# Altium PCB Copy of DAP-PCB.PcbDoc (part 3 of 5)
Units mm, origin at the board's own origin, x right, y up, seen from the top; angles counter-clockwise.
Board outline 63 x 53 mm, 6 copper layers (Top Layer (Sig), L2 (GND), L3 (Sig), L4 (Sig), L5 (GND), Bottom Layer (Sig)), stack 0.87 mm thick; 262 components, 167 nets, 874 pads, 298 vias.
Unrouted connection lines stored in the file: 134.
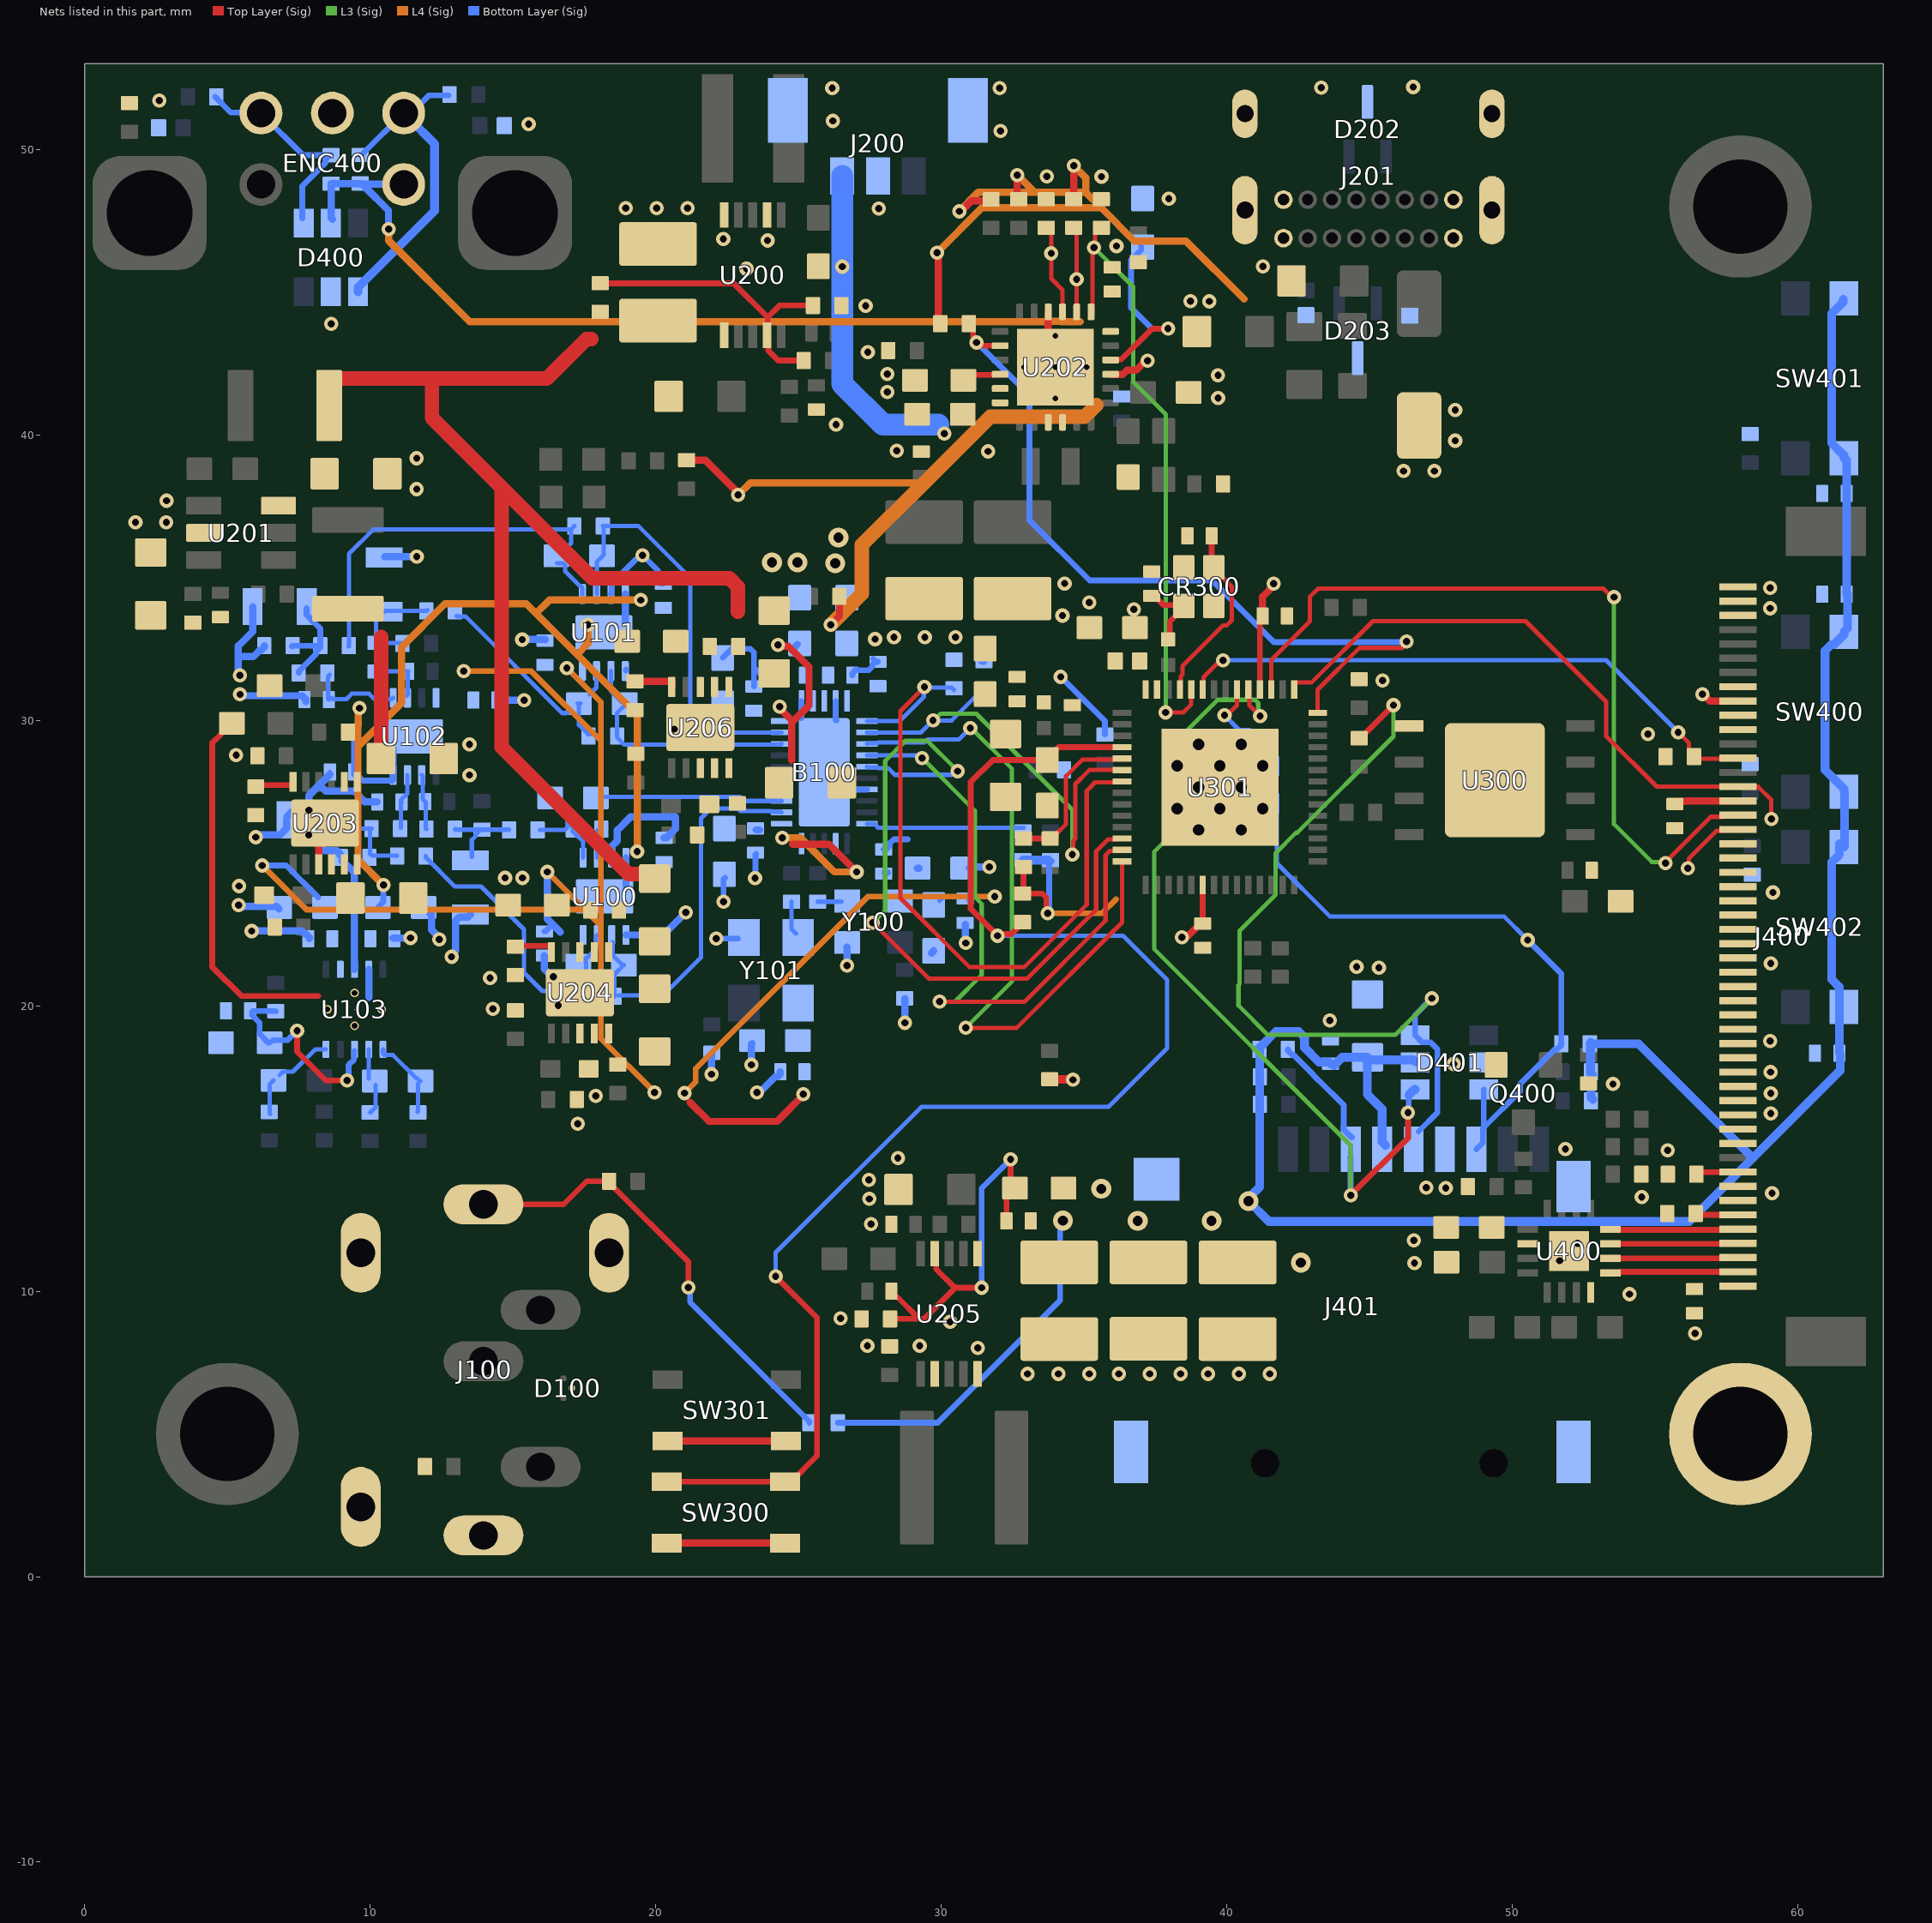
[diagram p6: the nets of this part, all layers, seen from the top]

## Part data (continued)
L204: library part #1-094, <Rating>=3.7A, <Tolerance>=0.2, <Value>=18uH, Manufacturer 1=Coilcraft, Manufacturer Part Number 1=XGL5050-183MEC, Supplier Part Number 1=2457-XGL5050-183MEC-ND, <Spec>=62.5mOhm, <Termination>=SMD, AL-PN=#1-094, Creator Project=DAP, Lead Time=N/A, PartType=Inductor, Status=Verified, SubType=Shielded, Supplier 1=Digikey, Supplier Label="18 µH Shielded Molded Inductor 4.5 A 62.5mOhm Max Nonstandard", Type=Standard
L300: library part #1-121, <Rating>=1A, <Value>=2nH, Manufacturer 1=TDK, Manufacturer Part Number 1=MHQ1005075HA2N0BTD25, Supplier Part Number 1=445-MHQ1005075HA2N0BTD25CT-ND, <Footprint>=0402, <Spec>=50mOhm, <Termination>=SMD, AL-PN=#1-121, Creator Project=DAP, Lead Time="12 Weeks", PartType=Inductor, Status=Verified, SubType=Shielded, Supplier 1=Digikey, Supplier Label="2 nH Shielded Multilayer Inductor 1 A 50mOhm Max 0402 (1005 Metric)", Type=Standard
L301: library part #1-120, <Rating>=250mA, <Tolerance>=0.03, <Value>=24nH, Manufacturer 1=TDK, Manufacturer Part Number 1=MHQ1005075HA24NHTD25, Supplier Part Number 1=445-MHQ1005075HA24NHTD25CT-ND, <Footprint>=0402, <Spec>=700mOhm, <Termination>=SMD, AL-PN=#1-120, Creator Project=DAP, Lead Time="12 Weeks", PartType=Inductor, Status=Verified, SubType=Shielded, Supplier 1=Digikey, Supplier Label="24 nH Shielded Multilayer Inductor 250 mA 700mOhm Max 0402 (1005 Metric)", Type=Standard
Q400: library part #1-130, <Rating>=2.5Vgs, <Value>=N-Type, Manufacturer 1=MCC, Manufacturer Part Number 1=2N7002-TP, Package="TO-236 MCC", Supplier Part Number 1=2N7002-TPMSCT-ND, <Termination>=SMD, AL-PN=#1-130, Check_prices=https://www.snapeda.com/parts/2N7002-TP/Micro+Commercial/view-part/?ref=eda, Creator Project=DAP, Lead Time=N/A, MF="Micro Commercial", MP=2N7002-TP, PartType=Transistor, SnapEDA_Link=https://www.snapeda.com/parts/2N7002-TP/Micro+Commercial/view-part/?ref=snap, Status=Verified, SubType=MOSFET, Supplier 1=Digikey, Supplier Label="N-Channel 60 V 115mA (Ta) 1.08W Surface Mount SOT-23", Type=Standard
R100 R101 R102 R103 R116 R117 R121 R123 R131 R134: library part #1-105, <Rating>=1/16W, <Tolerance>=0.001, <Value>=499Ohm, Manufacturer 1=YAGEO, Manufacturer Part Number 1=RT0402BRD07499RL, Supplier Part Number 1=YAG1440CT-ND, <Footprint>=0402, <Termination>=SMD, AL-PN=#1-105, Creator Project=DAP, Lead Time="23 Weeks", PartType=Resistor, Status=Verified, Supplier 1=Digikey, Supplier Label="499 Ohms ±0.1% 0.063W, 1/16W Chip Resistor 0402 (1005 Metric) Thin Film", Type=Standard
R104 R105 R303 R304 R305 R306 R307: library part #1-102, <Rating>=1/16W, <Tolerance>=0.01, <Value>=22Ohm, Manufacturer 1=YAGEO, Manufacturer Part Number 1=RC0402FR-0722RL, Supplier Part Number 1=311-22.0LRCT-ND, <Footprint>=0402, <Termination>=SMD, AL-PN=#1-102, Creator Project=DAP, Lead Time="22 Weeks", PartType=Resistor, Status=Verified, Supplier 1=Digikey, Supplier Label="22 Ohms ±1% 0.063W, 1/16W Chip Resistor 0402 (1005 Metric) Moisture Resistant Thick Film", Type=Standard
R106 R107 R109 R110 R111 R112 R113 R119 R129 R135 R208 R209 R210 R211 R216 R221 R223 R242 R300 R301 R400 R401 R402 R403 R404 R405 R406 R407 R408 R412 R413 R414 R415 R416 R417 R418 R419 R422: library part #1-134, <Tolerance>=0.01, <Value>=10kOhm, Manufacturer 1=YAGEO, Manufacturer Part Number 1=AC0402FR-0710KL, Supplier Part Number 1=YAG3436CT-ND, <Footprint>=0402, <Termination>=SMD, AL-PN=#1-134, Creator Project=DAP, Lead Time="22 Weeks", PartType=Resistor, Status=Verified, Supplier 1=Digikey, Supplier Label="10 kOhms ±1% 0.063W, 1/16W Chip Resistor 0402 (1005 Metric) Automotive AEC-Q200, Moisture Resistant Thick Film", Type=Standard
R114 R115 R126 R133: library part #1-109, <Rating>=1/16W, <Tolerance>=0.001, <Value>=220Ohm, Manufacturer 1=YAGEO, Manufacturer Part Number 1=RT0402BRD07220RL, Supplier Part Number 1=YAG4207CT-ND, <Footprint>=0402, <Termination>=SMD, AL-PN=#1-109, Creator Project=DAP, Lead Time="23 Weeks", PartType=Resistor, Status=Verified, Supplier 1=Digikey, Supplier Label="220 Ohms ±0.1% 0.063W, 1/16W Chip Resistor 0402 (1005 Metric) Thin Film", Type=Standard
R118 R204 R205 R212 R228 R239 R240 R241 R245 R420 R421 R424 R425: library part #1-131, <Tolerance>=0.01, <Value>=100kOhm, Manufacturer 1=YAGEO, Manufacturer Part Number 1=RT0402BRD07100KL, Supplier Part Number 1=YAG1343CT-ND, <Footprint>=0402, <Termination>=SMD, AL-PN=#1-131, Creator Project=DAP, Lead Time="23 Weeks", PartType=Resistor, Status=Verified, Supplier 1=Digikey, Supplier Label="100 kOhms ±0.1% 0.063W, 1/16W Chip Resistor 0402 (1005 Metric) Thin Film", Type=Standard
R120 R122 R124 R132: library part #1-110, <Rating>=1/16W, <Tolerance>=0.001, <Value>=681Ohm, Manufacturer 1=YAGEO, Manufacturer Part Number 1=RT0402BRD07681RL, Supplier Part Number 1=YAG1466CT-ND, <Footprint>=0402, <Termination>=SMD, AL-PN=#1-110, Creator Project=DAP, Lead Time="23 Weeks", PartType=Resistor, Status=Verified, Supplier 1=Digikey, Supplier Label="681 Ohms ±0.1% 0.063W, 1/16W Chip Resistor 0402 (1005 Metric) Thin Film", Type=Standard
R125 R127: library part #1-113, <Rating>=1/16W, <Tolerance>=0.001, <Value>=4.7Ohm, Manufacturer 1=YAGEO, Manufacturer Part Number 1=RT0402BRE074R7L, Supplier Part Number 1=13-RT0402BRE074R7LCT-ND, <Footprint>=0402, <Termination>=SMD, AL-PN=#1-113, Creator Project=DAP, Lead Time="23 Weeks", PartType=Resistor, Status=Verified, Supplier 1=Digikey, Supplier Label="4.7 Ohms ±0.1% 0.063W, 1/16W Chip Resistor 0402 (1005 Metric) Thin Film", Type=Standard
R128 R203 R237: library part #1-079, <Rating>=1/16W, <Tolerance>=0.001, <Value>=54.9kOhm, Manufacturer 1=YAGEO, Manufacturer Part Number 1=RT0402BRD0754K9L, Supplier Part Number 1=YAG1452CT-ND, <Footprint>=0402, <Termination>=SMD, AL-PN=#1-079, Creator Project=DAP, Lead Time="20 Weeks", PartType=Resistor, Status=Verified, Supplier 1=Digikey, Supplier Label="54.9 kOhms ±0.1% 0.063W, 1/16W Chip Resistor 0402 (1005 Metric) Thin Film", Type=Standard
R130 R207 R226 R231 R238 R247: library part #1-075, <Rating>=0.1W, <Tolerance>=0.001, <Value>=50kOhm, Manufacturer 1=YAGEO, Manufacturer Part Number 1=RT0603BRD0750KL, Supplier Part Number 1=13-RT0603BRD0750KLCT-ND, <Footprint>=0603, <Termination>=SMD, AL-PN=#1-075, Creator Project=DAP, Lead Time="20 Weeks", PartType=Resistor, Status=Verified, Supplier 1=Digikey, Supplier Label="50 kOhms ±0.1% 0.1W, 1/10W Chip Resistor 0603 (1608 Metric) Thin Film", Type=Standard
R200: library part #1-074, <Rating>=1/16W, <Tolerance>=0.001, <Value>=220kOhm, Manufacturer 1=YAGEO, Manufacturer Part Number 1=RC0402BR-07220KL, Supplier Part Number 1=13-RC0402BR-07220KLCT-ND, <Footprint>=0402, <Termination>=SMD, AL-PN=#1-074, Creator Project=DAP, Lead Time="17 Weeks", PartType=Resistor, Status=Verified, Supplier 1=Digikey, Supplier Label="220 kOhms ±0.1% 0.063W, 1/16W Chip Resistor 0402 (1005 Metric) Moisture Resistant Thick Film", Type=Standard
R201: library part #1-091, <Rating>=1/16W, <Tolerance>=0.001, <Value>=309kOhm, Manufacturer 1=YAGEO, Manufacturer Part Number 1=RE0402BRE07309KL, Supplier Part Number 1=13-RE0402BRE07309KLCT-ND, <Footprint>=0402, <Termination>=SMD, AL-PN=#1-091, Creator Project=DAP, Lead Time="20 Weeks", PartType=Resistor, Status=Verified, Supplier 1=Digikey, Supplier Label="309 kOhms ±0.1% 0.063W, 1/16W Chip Resistor 0402 (1005 Metric) Thick Film", Type=Standard
R202: library part #1-067, <Rating>=0.1W, <Tolerance>=0.005, <Value>=274kOhm, Manufacturer 1=YAGEO, Manufacturer Part Number 1=RT0603DRE07274KL, Supplier Part Number 1=13-RT0603DRE07274KLCT-ND, <Footprint>=0603, <Termination>=SMD, AL-PN=#1-067, Creator Project=DAP, Lead Time="20 Weeks", PartType=Resistor, Status=Verified, Supplier 1=Digikey, Supplier Label="RES SMD 274K OHM 0.5% 1/10W 0603", Type=Standard
R206 R229 R246 R302: library part #1-043, <Rating>=1/16W, <Tolerance>=0.001, <Value>=1kOhm, Manufacturer 1=YAGEO, Manufacturer Part Number 1=RT0402BRD071KL, Supplier Part Number 1=YAG1386TR-ND, <Footprint>=0402, <Termination>=SMD, AL-PN=#1-043, Creator Project=aRTy, Lead Time="20 Weeks", PartType=Resistor, Status=Verified, Supplier 1=Digikey, Supplier Label="1 kOhms ±0.1% 0.063W, 1/16W Chip Resistor 0402 (1005 Metric) Thin Film", Type=Standard
R213 R224: library part #1-078, <Rating>=1/16W, <Tolerance>=0.001, <Value>=15kOhm, Manufacturer 1=YAGEO, Manufacturer Part Number 1=RT0402BRD0715KL, Supplier Part Number 1=YAG2302CT-ND, <Footprint>=0402, <Termination>=SMD, AL-PN=#1-078, Creator Project=DAP, Lead Time="20 Weeks", PartType=Resistor, Status=Verified, Supplier 1=Digikey, Supplier Label="15 kOhms ±0.1% 0.063W, 1/16W Chip Resistor 0402 (1005 Metric) Thin Film", Type=Standard
R214: library part #1-060, <Rating>=1/16W, <Tolerance>=0.01, <Value>=5kOhm, Manufacturer 1=YAGEO, Manufacturer Part Number 1=RC0402FR-075KL, Supplier Part Number 1=13-RC0402FR-075KLCT-ND, <Footprint>=0402, <Termination>=SMD, AL-PN=#1-060, Creator Project=DAP, Lead Time="17 Weeks", PartType=Resistor, Status=Verified, Supplier 1=Digikey, Supplier Label="5 kOhms ±1% 0.063W, 1/16W Chip Resistor 0402 (1005 Metric) Moisture Resistant Thick Film", Type=Standard
R215: library part #1-061, <Rating>=1/16W, <Tolerance>=0.005, <Value>=9.88kOhm, Manufacturer 1=YAGEO, Manufacturer Part Number 1=RT0402DRD079K88L, Supplier Part Number 1=311-2214-1-ND, <Footprint>=0402, <Termination>=SMD, AL-PN=#1-061, Creator Project=DAP, Lead Time="20 Weeks", PartType=Resistor, Status=Verified, Supplier 1=Digikey, Supplier Label="9.88 kOhms ±0.5% 0.063W, 1/16W Chip Resistor 0402 (1005 Metric) Thin Film", Type=Standard
R217: library part #1-065, <Rating>=0.1W, <Tolerance>=0.01, <Value>=270Ohm, Manufacturer 1=YAGEO, Manufacturer Part Number 1=RC0603FR-07270RL, Supplier Part Number 1=311-270HRCT-ND, <Footprint>=0603, <Termination>=SMD, AL-PN=#1-065, Creator Project=DAP, Lead Time="17 Weeks", PartType=Resistor, Status=Verified, Supplier 1=Digikey, Supplier Label="270 Ohms ±1% 0.1W, 1/10W Chip Resistor 0603 (1608 Metric) Moisture Resistant Thick Film", Type=Standard
R218: library part #1-064, <Rating>=0.1W, <Tolerance>=0.001, <Value>=500Ohm, Manufacturer 1=YAGEO, Manufacturer Part Number 1=RT0603BRC07500RL, Supplier Part Number 1=13-RT0603BRC07500RLCT-ND, <Footprint>=0603, <Termination>=SMD, AL-PN=#1-064, Creator Project=DAP, Lead Time="20 Weeks", PartType=Resistor, Status=Verified, Supplier 1=Digikey, Supplier Label="500 Ohms ±0.1% 0.1W, 1/10W Chip Resistor 0603 (1608 Metric) Thin Film", Type=Standard
R219: library part #1-087, <Rating>=1/16W, <Tolerance>=0.01, <Value>=88.7kOhm, Manufacturer 1=YAGEO, Manufacturer Part Number 1=RC0402FR-0788K7L, Supplier Part Number 1=311-88.7KLRCT-ND, <Footprint>=0402, <Termination>=SMD, AL-PN=#1-087, Creator Project=DAP, Lead Time="17 Weeks", PartType=Resistor, Status=Verified, Supplier 1=Digikey, Supplier Label="88.7 kOhms ±1% 0.063W, 1/16W Chip Resistor 0402 (1005 Metric) Moisture Resistant Thick Film", Type=Standard
R220: library part #1-086, <Rating>=1/10W, <Tolerance>=0.001, <Value>=135kOhm, Manufacturer 1=YAGEO, Manufacturer Part Number 1=RT0603BRD07135KL, Supplier Part Number 1=13-RT0603BRD07135KLCT-ND, <Footprint>=0603, <Termination>=SMD, AL-PN=#1-086, Creator Project=DAP, Lead Time="20 Weeks", PartType=Resistor, Status=Verified, Supplier 1=Digikey, Supplier Label="135 kOhms ±0.1% 0.1W, 1/10W Chip Resistor 0603 (1608 Metric) Thin Film", Type=Standard
R222 R243: library part #1-083, <Rating>=1/16W, <Tolerance>=0.01, <Value>=909kOhm, Manufacturer 1=YAGEO, Manufacturer Part Number 1=RC0402FR-07909KL, Supplier Part Number 1=YAG2377CT-ND, <Footprint>=0402, <Termination>=SMD, AL-PN=#1-083, Creator Project=DAP, Lead Time="17 Weeks", PartType=Resistor, Status=Verified, Supplier 1=Digikey, Supplier Label="909 kOhms ±1% 0.063W, 1/16W Chip Resistor 0402 (1005 Metric) Moisture Resistant Thick Film", Type=Standard
R225 R244: library part #1-084, <Rating>=1/16W, <Tolerance>=0.001, <Value>=90.9kOhm, Manufacturer 1=YAGEO, Manufacturer Part Number 1=RT0402BRD0790K9L, Supplier Part Number 1=YAG1489CT-ND, <Footprint>=0402, <Termination>=SMD, AL-PN=#1-084, Creator Project=DAP, Lead Time="20 Weeks", PartType=Resistor, Status=Verified, Supplier 1=Digikey, Supplier Label="90.9 kOhms ±0.1% 0.063W, 1/16W Chip Resistor 0402 (1005 Metric) Thin Film", Type=Standard
R227: library part #1-097, <Rating>=1/4W, <Tolerance>=0.01, <Value>=0.5Ohms, Manufacturer 1=YAGEO, Manufacturer Part Number 1=PE0805FRF7W0R5L, Supplier Part Number 1=13-PE0805FRF7W0R5LCT-ND, <Footprint>=0805, <Termination>=SMD, AL-PN=#1-097, Creator Project=DAP, Lead Time="20 Weeks", PartType=Resistor, Status=Verified, Supplier 1=Digikey, Supplier Label="500 mOhms ±1% 0.25W, 1/4W Chip Resistor 0805 (2012 Metric) Automotive AEC-Q200, Current Sense Metal Film", Type=Standard
R230: library part #1-088, <Rating>=1/16W, <Tolerance>=0.01, <Value>=15.4kOhm, Manufacturer 1=YAGEO, Manufacturer Part Number 1=RT0402BRD0715K4L, Supplier Part Number 1=YAG4177CT-ND, <Footprint>=0402, <Termination>=SMD, AL-PN=#1-088, Creator Project=DAP, Lead Time="20 Weeks", PartType=Resistor, Status=Verified, Supplier 1=Digikey, Supplier Label="15.4 kOhms ±0.1% 0.063W, 1/16W Chip Resistor 0402 (1005 Metric) Thin Film", Type=Standard
R232 R233 R248: library part #1-085, <Rating>=1/16W, <Tolerance>=0.001, <Value>=33.2kOhm, Manufacturer 1=YAGEO, Manufacturer Part Number 1=RT0402BRD0733K2L, Supplier Part Number 1=YAG4244CT-ND, <Footprint>=0402, <Termination>=SMD, AL-PN=#1-085, Creator Project=DAP, Lead Time="20 Weeks", PartType=Resistor, Status=Verified, Supplier 1=Digikey, Supplier Label="33.2 kOhms ±0.1% 0.063W, 1/16W Chip Resistor 0402 (1005 Metric) Thin Film", Type=Standard
R234 R235: library part #1-024, <Rating>=1/16W, <Tolerance>=0.001, <Value>=5.1kOhm, Manufacturer 1=YAGEO, Manufacturer Part Number 1=RT0402BRE075K1L, Supplier Part Number 1=YAG4404TR-ND, <Footprint>=0402, <Termination>=SMD, AL-PN=#1-024, Creator Project=aRTy, Lead Time="20 Weeks", PartType=Resistor, Status=Verified, Supplier 1=Digikey, Supplier Label="5.1 kOhms ±0.1% 0.063W, 1/16W Chip Resistor 0402 (1005 Metric) Thin Film", Type=Standard
R236: library part #1-095, <Rating>=1/10W, <Tolerance>=0.001, <Value>=172kOhm, Manufacturer 1=YAGEO, Manufacturer Part Number 1=RT0603BRD07172KL, Supplier Part Number 1=13-RT0603BRD07172KLCT-ND, <Footprint>=0603, <Termination>=SMD, AL-PN=#1-095, Creator Project=DAP, Lead Time="20 Weeks", PartType=Resistor, Status=Verified, Supplier 1=Digikey, Supplier Label="172 kOhms ±0.1% 0.1W, 1/10W Chip Resistor 0603 (1608 Metric) Thin Film", Type=Standard
R308: library part #1-123, <Rating>=1/16W, <Tolerance>=0.001, <Value>=1MOhm, Manufacturer 1=YAGEO, Manufacturer Part Number 1=RE0402BRE071ML, Supplier Part Number 1=13-RE0402BRE071MLCT-ND, <Footprint>=0402, <Termination>=SMD, AL-PN=#1-123, Creator Project=DAP, Lead Time="20 Weeks", PartType=Resistor, Status=Verified, Supplier 1=Digikey, Supplier Label="1 MOhms ±0.1% 0.063W, 1/16W Chip Resistor 0402 (1005 Metric) Thick Film", Type=Standard
R423: library part #1-133, <Tolerance>=0.01, <Value>=32.4kOhm, Manufacturer 1=YAGEO, Manufacturer Part Number 1=RC0402FR-0732K4L, Supplier Part Number 1=YAG3119CT-ND, <Footprint>=0402, <Termination>=SMD, AL-PN=#1-133, Creator Project=DAP, Lead Time="22 Weeks", PartType=Resistor, Status=Verified, Supplier 1=Digikey, Supplier Label="32.4 kOhms ±1% 0.063W, 1/16W Chip Resistor 0402 (1005 Metric) Moisture Resistant Thick Film", Type=Standard
SW300 SW301: library part #1-115, <Value>=SPST, Manufacturer 1=C&K, Manufacturer Part Number 1="PTS810SJM250SMTR LFS", Package=None, Supplier Part Number 1=CKN10502CT-ND, <Footprint>=Vert, <Termination>=SMD, AL-PN=#1-115, Check_prices=https://www.snapeda.com/parts/PTS810%20SJM%20250%20SMTR%20LFS/C%2526K/view-part/?ref=eda, Creator Project=DAP, Lead Time="16 Weeks", MF=C&K, MP="PTS810 SJM 250 SMTR LFS", PartType=Switch, SnapEDA_Link=https://www.snapeda.com/parts/PTS810%20SJM%20250%20SMTR%20LFS/C%2526K/view-part/?ref=snap, Status=Verified, SubType=Tacticle, Supplier 1=Digikey, Supplier Label="Tactile Switch SPST-NO Top Actuated Surface Mount", Type=Standard
SW400 SW401 SW402: library part #1-114, <Value>=SPST, Manufacturer 1=E-Switch, Manufacturer Part Number 1=TL1014BF220QG, Supplier Part Number 1=141-TL1014BF220QGCT-ND, <Footprint>=R/A, <Termination>=SMD, AL-PN=#1-114, Creator Project=DAP, Lead Time="7 Weeks", PartType=Switch, Status=Verified, SubType=Tacticle, Supplier 1=Digikey, Supplier Label="Tactile Switch SPST-NO Side Actuated Surface Mount, Right Angle", Type=Standard
U100 U101 U102: library part #1-104, Manufacturer 1="Texas Instruments", Manufacturer Part Number 1=OPA1612AIDRGR, Supplier Part Number 1=296-38367-1-ND, <Termination>=SMD, AL-PN=#1-104, Creator Project=DAP, Lead Time="16 Weeks", PartType=IC, Status=Verified, SubType=Op-Amp, Supplier 1=Digikey, Supplier Label="Audio Amplifier 2 Circuit Rail-to-Rail 8-SON (3x3)", Type=Standard
U103: library part #1-056, Manufacturer 1="Texas Instruments", Manufacturer Part Number 1=OPA1622IDRCR, Package="VSON-10 Texas Instruments", Supplier Part Number 1=296-45038-1-ND, <Termination>=SMD, AL-PN=#1-056, Check_prices=https://www.snapeda.com/parts/OPA1622IDRCR/Texas+Instruments/view-part/?ref=eda, Creator Project=DAP, Lead Time="16 Weeks", MF="Texas Instruments", MP=OPA1622IDRCR, PartType=IC, SnapEDA_Link=https://www.snapeda.com/parts/OPA1622IDRCR/Texas+Instruments/view-part/?ref=snap, Status=Verified, SubType=Op-Amp, Supplier 1=Digikey, Supplier Label="Audio Amplifier 2 Circuit 10-VSON (3x3)", Type=Standard
U200 U205: library part #1-050, Manufacturer 1="Analog Devices", Manufacturer Part Number 1=LTC3440EMS#TRPBF, Package="MSOP-10 Linear Technology", Supplier Part Number 1=LTC3440EMS#TRPBFCT-ND, <Termination>=SMD, AL-PN=#1-050, Check_prices=https://www.snapeda.com/parts/LTC3440EMS%23TRPBF/Analog+Devices/view-part/?ref=eda, Creator Project=DAP, Lead Time="21 Weeks", MF="Analog Devices", MP=LTC3440EMS#TRPBF, PartType=IC, SnapEDA_Link=https://www.snapeda.com/parts/LTC3440EMS%23TRPBF/Analog+Devices/view-part/?ref=snap, Status=Verified, SubType=Buck-Boost, Supplier 1=Digikey, Supplier Label="Buck-Boost Switching Regulator IC Positive Adjustable 2.5V 1 Output 600mA 10-TFSOP, 10-MSOP (0.118\", 3.00mm Width)", Type=Standard
U201: library part #1-089, Manufacturer 1="Analog Devices", Manufacturer Part Number 1=LT3462AES6#TRPBF, Manufacturer_Name="Analog Devices Inc", Manufacturer_Part_Number=LT3093EDD#TRPBF, Supplier Part Number 1=LT3462AES6#TRPBFCT-ND, <Termination>=SMD, AL-PN=#1-089, Copyright="Copyright (C) 2026 Ultra Librarian. All rights reserved.", Creator Project=DAP, Lead Time="10 Weeks", PartType=IC, RefDes=RefDes, Status=Verified, SubType=Regulator, Supplier 1=Digikey, Supplier Label="Cuk Switching Regulator IC Negative Adjustable -1.265V 1 Output 250mA SOT-23-6 Thin, TSOT-23-6", Type=Standard
U202: library part #1-054, Manufacturer 1="Texas Instruments", Manufacturer Part Number 1=BQ24250RGET, Package="VQFN-24 Texas Instruments", Supplier Part Number 1=296-36180-1-ND, <Termination>=SMD, AL-PN=#1-054, Check_prices=https://www.snapeda.com/parts/BQ24250RGET/Texas+Instruments/view-part/?ref=eda, Creator Project=DAP, Lead Time="16 Weeks", MF="Texas Instruments", MP=BQ24250RGET, PartType=IC, SnapEDA_Link=https://www.snapeda.com/parts/BQ24250RGET/Texas+Instruments/view-part/?ref=snap, Status=Verified, SubType=Charger, Supplier 1=Digikey, Supplier Label="Charger IC Lithium Ion 24-VQFN (4x4)", Type=Standard
U203: library part #1-052, Manufacturer 1="Analog Devices", Manufacturer Part Number 1=LT3093EDD#TRPBF, Manufacturer_Name="Analog Devices Inc", Supplier Part Number 1=505-LT3093EDD#TRPBFCT-ND, <Termination>=SMD, AL-PN=#1-052, Copyright="Copyright (C) 2026 Ultra Librarian. All rights reserved.", Creator Project=DAP, Lead Time="21 Weeks", Manufacturer_Part_Number=LT3093EDD#TRPBF, PartType=IC, RefDes=RefDes, Status=Verified, SubType=LDO, Supplier 1=Digikey, Supplier Label="Linear Voltage Regulator IC Negative Adjustable 1 Output 200mA 12-DFN (3x3)", Type=Standard
U204 U206: library part #1-051, Manufacturer 1="Analog Devices", Manufacturer Part Number 1=LT3042EDD#PBF, Package="DFN-10 Linear Technology", Supplier Part Number 1=505-LT3042EDD#PBF-ND, <Termination>=SMD, AL-PN=#1-051, Check_prices=https://www.snapeda.com/parts/LT3042EDD%23PBF/Analog+Devices/view-part/?ref=eda, Creator Project=DAP, Lead Time="21 Weeks", MF="Analog Devices", MP=LT3042EDD#PBF, PartType=IC, SnapEDA_Link=https://www.snapeda.com/parts/LT3042EDD%23PBF/Analog+Devices/view-part/?ref=snap, Status=Verified, SubType=LDO, Supplier 1=Digikey, Supplier Label="Linear Voltage Regulator IC Positive Adjustable 1 Output 200mA 10-DFN (3x3)", Type=Standard
U300: library part #1-124, <Rating>=133MHz, <Value>=64Bit, Manufacturer 1="Gigadevice Electronics Singapore PTE.LTD.", Manufacturer Part Number 1=GD25B64EWIGR, Supplier Part Number 1=1970-GD25B64EWIGRCT-ND, <Termination>=SMD, AL-PN=#1-124, Creator Project=DAP, Lead Time=N/A, PartType=IC, Status=Verified, SubType=FLASH, Supplier 1=Digikey, Supplier Label="FLASH - NOR (SLC) Memory IC 64Mbit SPI - Quad I/O 133 MHz 7 ns 8-WSON (5x6)", Type=Standard
U301: library part #1-055, Manufacturer 1="Espressif Technologies", Package=None, Supplier Part Number 1=1965-ESP32-S3-ND, <Termination>=SMD, AL-PN=#1-055, Availability="In Stock", Check_prices=https://www.snapeda.com/parts/ESP32-S3/Espressif+Systems/view-part/?ref=eda, Creator Project=DAP, Lead Time="8 Weeks", Manufacturer Part Number 1=ESP32-S3, MF="Espressif Systems", MP=ESP32-S3, PartType=MCU, Price=None, Purchase-URL=https://pricing.snapeda.com/search/part/ESP32-S3/?ref=eda, SnapEDA_Link=https://www.snapeda.com/parts/ESP32-S3/Espressif+Systems/view-part/?ref=snap, Status=Verified, SubType=ESP-32, Supplier 1=Digikey, Supplier Label="IC RF TxRx + MCU Bluetooth, WiFi 802.11b/g/n, Bluetooth v5.0 2.412GHz ~ 2.484GHz 56-VFQFN Exposed Pad", Type=Standard
U400: library part #1-128, Manufacturer 1="Rohm Semiconductor", Manufacturer Part Number 1=BD1604MUV-E2, Manufacturer_Name="ROHM Semiconductor", Supplier Part Number 1=BD1604MUV-E2CT-ND, <Termination>=SMD, AL-PN=#1-128, Copyright="Copyright (C) 2025 Ultra Librarian. All rights reserved.", Creator Project=DAP, Lead Time="12 Weeks", Manufacturer_Part_Number=BD1604MUV-E2, PartType=IC, RefDes=RefDes, Status=Verified, SubType="LED Driver", Supplier 1=Digikey, Supplier Label="LED Driver IC 4 Output DC DC Regulator Switched Capacitor (Charge Pump) Dimming 30mA VQFN016V3030", Type=Standard
Y100: library part #1-100, <Rating>=2.2mA, <Value>=22.5792MHz, Manufacturer 1="ECS Inc.", Manufacturer Part Number 1=ECS-2520MVLC-225.792-CN-TR, Package=None, Supplier Part Number 1=50-ECS-2520MVLC-225.792-CN-TRCT-ND, <Termination>=SMD, AL-PN=#1-100, Availability=Unavailable, Creator Project=DAP, Lead Time="19 Weeks", MP=ASTX-H11-24.576MHZ-T, PartType=Oscillator, Price=None, Status=Verified, SubType=Crystal, Supplier 1=Digikey, Supplier Label="22.5792 MHz XO (Standard) CMOS Oscillator 1.6V ~ 3.6V Enable/Disable 4-SMD, No Lead", Type=Standard
Y101: library part #1-101, <Rating>=5.5mA, <Value>=24.576MHz, Manufacturer 1="Abracon LLC", Manufacturer Part Number 1=ASTX-H11-24.576MHZ-T, Package=None, Supplier Part Number 1=535-12038-1-ND, <Termination>=SMD, AL-PN=#1-101, Availability=Unavailable, Creator Project=DAP, Lead Time="16 Weeks", MP=ASTX-H11-24.576MHZ-T, PartType=Oscillator, Price=None, Status=Verified, SubType=Crystal, Supplier 1=Digikey, Supplier Label="24.576 MHz TCXO HCMOS Oscillator 3.3V Enable/Disable 4-SMD, No Lead", Type=Standard

## Free pads (board coordinates)
  round 5 hole 3.3: ""(5,5) ""(58,5) ""(58,48)

## Via types
v1: diameter 0.5, hole 0.25, Top Layer (Sig) to Bottom Layer (Sig), tented both sides, 270 vias
v2: diameter 0.7, hole 0.35, Top Layer (Sig) to Bottom Layer (Sig), tented both sides, 17 vias
v3: diameter 1.25, hole 0.75, Top Layer (Sig) to Bottom Layer (Sig), 6 vias
v4: diameter 0.4/0.4/0.4/0.4/0.4/0.4 (per signal layer), hole 0.2, Top Layer (Sig) to Bottom Layer (Sig), tented both sides, 5 vias

## Nets (pads, with @x,y where several pads share a name; then routed paths per layer and width w, separated by ;. In a path a pad name is that pad's centre, name@x,y a point inside that pad or via, vN(x,y) a via of type N, cw(c..) or ccw(c..) an arc to the next point about the centre after c; other vN are vias at no path point)
22.5792_OUT: R104.1 Y100.3 | length 0.8
  Bottom Layer (Sig) w0.152: R104.1@25.679,23.646 26.516,23.646 Y100.3@26.518,23.647
24.576_OUT: R105.2 Y101.3 | length 1.2
  Bottom Layer (Sig) w0.152: R105.2@24.765,23.646 24.765,22.682 Y101.3@24.917,22.53
40MHz_IN: C308.1 CR300.1 L301.1 | length 2.5
  Top Layer (Sig) w0.203: C308.1@37.378,34.36 37.466,34.36 37.789,34.036 CR300.1@38.43,34.036 ; L301.1@38.013,32.847 38.013,33.467 38.456,33.909 CR300.1@38.456,34.011
40MHz_OUT: C310.1 CR300.3 U301.53 | length 6.5
  Top Layer (Sig) w0.152: U301.53@38.364,31.084 38.398,31.118 38.398,31.544 38.452,31.597 38.452,31.898 39.882,33.329 40.008,33.329 40.183,33.504 40.183,34.679 39.554,35.308 CR300.3@39.554,35.358
  Top Layer (Sig) w0.203: C310.1@39.497,36.5 39.48,36.482 39.48,35.433 CR300.3@39.554,35.358
+3V3_ANALOG: C102.2 C103.2 C104.2 C105.2 C109.2 C111.2 C126.2 C128.2 C129.2 C217.2 R222.2 U100.8 U101.8 U102.8 U103.2 U204.9 U204.10 Y100.4 Y101.4 | length 60.3
  Top Layer (Sig) w0.254: 21.209,16.612 21.872,15.949 24.255,15.949 v1@25.169,16.863
  L4 (Sig) w0.203: v1@6.248,24.867 6.274,24.867 7.772,23.368 17.526,23.368 ; v1@13.259,31.775 13.31,31.724 15.647,31.724 18.085,29.286 ; v1@16.281,24.689 16.281,24.613 17.526,23.368 ; v1@16.942,31.928 16.942,31.784 18.085,30.641 18.085,29.286 ; 17.987,22.907 17.526,23.368 ; v1@19.978,16.954 v1(19.964,16.967) 18.085,18.847 18.085,22.809 18.085,22.907 18.085,29.286 ; v1(21.012,16.94) 21.404,17.332 21.404,17.794 27.435,23.825 31.826,23.825 v1@31.928,23.927 ; v1@21.019,16.954 v1@21.031,16.942
  Bottom Layer (Sig) w0.152: Y100.4@28.778,23.597 Y100.4@28.847,23.528 ; C102.2@29.947,23.673 C102.2@30.03,23.757
  Bottom Layer (Sig) w0.203: v1(6.223,24.917) 7.061,24.917 C129.2@8.179,23.8 ; C109.2@16.104,22.607 16.145,22.607 C109.2@16.256,22.718 ; C103.2@30.988,23.692 C103.2@30.988,23.724
  Bottom Layer (Sig) w0.254: v1(16.205,24.689) 16.205,23.038 16.662,22.581
  other v1: 25.169,16.907 31.877,23.825 13.282,31.724 16.891,31.835
+3V3_DAC: B100.1 B100.10 B100.12 B100.27 C112.2 C113.2 C114.2 C115.2 C116.2 C119.2 C120.2 C139.2 C231.2 R243.2 U206.9 U206.10 | length 11.7
  Top Layer (Sig) w0.254: v1@24.333,32.664 24.333,32.655 24.396,32.592 24.653,32.592 25.375,31.871 25.375,30.526 24.765,29.917 ; v1@24.359,30.505 24.359,30.411 24.765,30.004 24.765,29.917 ; 24.765,28.6 24.765,29.917 ; 24.79,25.654 26.078,25.654 26.967,24.765 v1@26.975,24.765
  L4 (Sig) w0.254: v1(24.435,25.883) 25.071,25.883 26.264,24.69 v1(27.042,24.69)
  Bottom Layer (Sig) w0.254: C114.2@23.52,26.162 C114.2@23.641,26.162 ; C120.2@24.838,32.534 C120.2@24.968,32.664 ; C112.2@28.042,24.663 C112.2@28.115,24.663 ; C113.2@29.172,24.823 C113.2@29.222,24.823
  other v1: 24.35,30.481 24.282,32.639
+3V3_DIG: B100.13 C121.2 C122.2 C225.2 C227.2 C228.2 C229.2 C300.2 C301.2 C303.2 C304.2 C305.2 C306.2 C307.2 C401.2 C402.2 C403.2 C407.2 C408.2 C409.2 D400.5 D401.5 ENC400.4 J400.7 J400.8 J400.35 J400.40 J400.41 J400.42 J401.4 L300.2 R109.2 R110.2 R118.2 R135.2 R208.2 R209.2 R210.2 R211.2 R223.2 R236.2 R241.2 R242.2 R300.2 R301.2 R405.2 R407.2 R414.2 R415.2 R416.2 R417.2 R418.2 R419.1 SW400.2 SW400.4 SW401.2 SW401.4 SW402.2 SW402.4 U205.6 U301.20 U301.46 U301.55 U301.56 | length 190.4
  Top Layer (Sig) w0.203: R300.2@32.868,24.079 32.882,24.079 R301.2@32.882,24.861 ; R300.2@32.893,23.945 32.907,23.931 33.549,23.931 33.684,23.796 33.684,23.288 v1(33.731,23.241) ; C301.2@36.857,33.26 C301.2@37.046,33.071 ; C300.2@37.046,32.067 C300.2@37.109,32.004 ; C307.2@39.167,22.879 39.166,22.88 39.166,24.154 U301.20@39.167,24.155 ; U301.46@41.164,31.084 C306.2@41.164,33.422
  Top Layer (Sig) w0.254: R242.2@21.082,39.116 21.743,39.116 22.841,38.018 22.841,38.008 22.952,37.897 v1@22.962,37.897 ; v1(26.137,33.35) 26.137,33.355 26.441,33.66 R241.2@26.441,34.315 ; v1(29.855,46.387) 29.902,46.34 29.902,43.91 R210.2@29.921,43.891 ; v1(30.636,47.835) 30.702,47.835 31.069,48.202 31.692,48.202 R208.2@31.75,48.26 ; v1(32.668,49.105) 32.668,48.435 R211.2@32.715,48.387 ; R209.2@34.595,48.184 34.646,48.235 v1(34.646,49.428) ; v1(38.436,22.403) 38.483,22.45 38.651,22.45 38.994,22.793 39.1,22.793 C307.2@39.167,22.86 ; C306.2@41.263,33.655 41.263,34.336 41.648,34.721 v1(41.648,34.786) ; C407.2@55.753,27.07 55.839,27.155 56.053,27.155 56.075,27.177 J400.35@57.912,27.177 ; v1(56.665,30.913) 56.691,30.913 56.927,30.677 J400.42@57.912,30.677
  Top Layer (Sig) w0.305: R223.2@33.807,17.424 33.815,17.416 34.654,17.416 v1@34.671,17.399
  L4 (Sig) w0.203: v1(33.731,23.241) 35.636,23.241 36.129,23.734
  L4 (Sig) w0.254: v1(10.651,47.209) 10.651,46.804 13.483,43.971 33.786,43.971 33.794,43.98 34.212,43.98 34.22,43.971 34.878,43.971 ; v1(22.888,37.894) 23.309,38.316 29.4,38.316 ; v1@29.845,46.377 31.435,47.967 35.597,47.967 ; v1@30.607,47.806 31.301,48.5 33.272,48.5 ; v1@32.725,49.047 33.272,48.5 ; v1(34.646,49.428) 35.064,49.01 35.064,48.5 ; 40.615,44.755 38.583,46.786 36.778,46.786 35.597,47.967 ; 33.272,48.5 35.064,48.5 ; 35.064,48.5 35.597,47.967
  L4 (Sig) w0.508: v1(26.137,33.35) 27.228,34.441 27.228,36.143 29.4,38.316 31.728,40.643 35.03,40.643 35.433,41.046
  Bottom Layer (Sig) w0.203: R118.2@26.383,5.392 29.878,5.392 34.17,9.684 34.17,12.351 v2@34.239,12.421 ; v1(33.731,23.241) 33.782,23.292 33.782,24.968 R109.2@33.884,25.07 ; v1(34.188,31.521) 35.738,29.972 R110.2@35.738,29.515
  Bottom Layer (Sig) w0.254: R407.2@8.636,48.801 8.631,48.796 8.631,47.605 D400.5@8.687,47.549 ; R407.2@8.738,48.819 8.751,48.805 9.648,48.805 R405.2@9.652,48.809 ; v1@10.643,47.193 10.643,47.864 9.825,48.681 9.825,48.686 9.702,48.809 R405.2@9.652,48.809 ; ENC400.4@11.074,48.717 10.999,48.792 9.669,48.792 R405.2@9.652,48.809
  Bottom Layer (Sig) w0.305: R135.2@32.868,25.103 33.749,25.103 R109.2@33.757,25.095 ; R414.2@41.148,18.473 41.156,18.465 R416.2@41.156,17.483 ; R414.2@41.148,18.523 41.728,19.104 42.517,19.104 42.728,18.893 42.728,18.537 43.233,18.031 43.577,18.031 C408.2@43.637,17.971 ; R416.2@41.164,17.508 R417.2@41.164,16.543 41.164,13.661 40.767,13.264 v2(40.767,13.157) 41.483,12.441 56.205,12.441 58.433,14.668 ; C408.2@43.764,17.907 44.051,18.194 C409.2@44.933,18.194 ; J401.4@45.568,15.113 45.449,15.231 45.449,16.376 44.933,16.892 C409.2@44.933,18.194 ; D401.5@46.609,18.034 46.538,18.105 45.022,18.105 C409.2@44.933,18.194 ; R415.2@52.722,18.669 52.744,18.648 52.744,17.665 R418.2@52.807,17.602 ; R415.2@52.756,18.72 52.807,18.669 54.432,18.669 58.433,14.668 ; R418.2@52.765,17.602 52.765,16.78 R419.1@52.832,16.713 ; C401.2@61.461,18.339 61.461,20.657 61.194,20.924 61.194,25.028 61.468,25.302 SW402.4@61.468,25.679 ; C401.2@61.49,18.31 61.49,17.726 58.433,14.668 ; SW401.4@61.595,44.755 61.595,44.651 61.194,44.25 61.194,39.71 61.625,39.28 SW401.2@61.625,39.18 ; SW402.4@61.625,25.558 61.646,25.58 SW400.2@61.646,27.457 ; SW400.2@61.625,27.502 61.625,27.602 60.96,28.267 60.96,32.438 61.177,32.655 61.277,32.655 SW400.4@61.625,33.002 ; SW400.4@61.625,33.102 61.747,33.225 C402.2@61.747,34.417 ; SW401.2@61.671,39.167 61.715,39.123 C403.2@61.715,37.948 C402.2@61.715,34.417
  other v1: 59.106,13.437 34.618,17.409 36.75,33.889
  other v2: 42.599,11.004 36.884,12.465 39.475,12.465 34.265,12.471 35.611,13.589
+3V9: C204.2 C211.2 C220.2 C232.2 L201.1 R200.2 R225.2 R244.2 U200.6 U201.6 U204.1 U204.2 U206.1 U206.2 | length 42.3
  Top Layer (Sig) w0.508: L201.1@8.565,41.029 8.565,41.775 8.761,41.971 16.19,41.971 ; 12.167,41.92 12.167,40.592 14.605,38.153 ; 16.226,42.007 16.383,42.164 17.577,43.358 17.755,43.358 ; C220.2@19.969,24.459 19.813,24.615 19.048,24.615 14.605,29.058 14.605,38.153 ; 22.885,33.807 22.885,34.678 22.588,34.976 17.783,34.976 14.605,38.153
+LED: C400.2 C413.2 J400.1 U400.6
-3V3: C108.2 C110.2 C125.2 C134.2 C135.2 C216.2 R220.2 U100.4 U100.9 U101.4 U101.9 U102.4 U102.9 U103.4 U103.11 U203.10 U203.11 U203.12 | length 53
  Top Layer (Sig) w0.203: R220.2@5.207,29.896 5.108,29.896 4.809,29.597 4.809,29.549 4.471,29.21 4.471,21.361 5.486,20.345 8.184,20.345
  L4 (Sig) w0.254: v1(9.627,30.429) 9.58,30.382 9.58,29.805 9.576,29.801 9.576,29.083 ; v1(10.465,24.232) 9.576,25.121 9.576,29.083 ; v1@17.653,33.376 v1(17.628,33.35) 17.628,32.69 17.247,32.309 ; v1(19.355,25.4) 19.355,30.201 17.247,32.309 ; v1@19.507,34.163 19.456,34.214 16.281,34.214 15.811,33.744 ; 9.576,29.083 11.1,30.607 11.1,32.563 12.624,34.087 15.469,34.087 15.811,33.744 ; 15.811,33.744 17.247,32.309
  Bottom Layer (Sig) w0.203: C125.2@9.442,28.194 9.442,28.106 9.553,27.995 9.64,27.995 9.747,27.889 10.783,27.889 10.807,27.913 U102.4@10.807,28.086 ; C125.2@9.442,28.201 9.442,29.773 9.57,29.901 9.57,30.372 v1(9.627,30.429) ; 9.954,20.298 9.957,20.295 ; C135.2@10.274,23.444 10.465,23.635 v1(10.465,24.232) ; U102.9@10.795,29.032 U102.9@10.807,29.02 ; U100.9@18.962,24.218 U100.9@18.974,24.206
  Bottom Layer (Sig) w0.254: 9.954,20.298 U103.4@9.954,21.275 ; U102.4@10.807,28.086 U102.9@10.807,29.02 ; U101.9@18.936,33.44 U101.4@18.936,34.428 ; U100.9@18.962,24.218 U100.4@18.962,25.183
  other v1: 19.482,34.214
-3V9: C205.2 C206.2 C218.2 L202.2 R201.2 R219.2 U203.1 U203.2 | length 4.3
  Top Layer (Sig) w0.508: C218.2@10.381,28.659 10.381,32.925
ADDR_DAC: B100.25 R135.1 | length 5.6
  Bottom Layer (Sig) w0.152: B100.25@27.408,26.376 27.683,26.376 27.707,26.352 27.707,26.327 27.796,26.238 R135.1@32.893,26.238
BAT+: C215.2 J200.1 U202.11 U202.12 | length 11.2
  Bottom Layer (Sig) w0.762: J200.1@26.538,49.071 v1(26.537,45.897) 26.538,41.788 27.965,40.361 29.912,40.361
  other v1: 31.648,39.421 30.116,40.046
BOOT0: R301.1 R302.1 U301.5 | length 5.3
  Top Layer (Sig) w0.152: R301.1@32.922,25.861 R301.1@32.944,25.883 ; R302.1@34.011,26 34.375,26.364 34.375,28.05 34.95,28.625 36.306,28.625 U301.5@36.339,28.659
  Top Layer (Sig) w0.203: R301.1@32.999,25.861 R302.1@33.822,25.861
BOOT_BQ: C207.2 U202.21 | length 1.5
  Top Layer (Sig) w0.254: U202.21@35.938,42.125 36.367,42.125 36.505,42.263 36.829,42.263 37.17,42.603 v1(37.236,42.603)
CE_BQ: R221.2 U202.1 U301.52 | length 22
  Top Layer (Sig) w0.152: U202.1@35.253,44.31 35.297,44.354 35.297,46.506 35.387,46.596 35.387,47.086 35.527,47.226 R221.2@35.611,47.226 ; v1(37.867,30.277) 38.481,30.277 38.761,30.557 38.761,31.081 U301.52@38.764,31.084
  L3 (Sig) w0.152: v1@35.433,46.634 35.433,46.49 36.732,45.19 36.732,41.854 37.867,40.719 v1(37.867,30.277)
  other v1: 35.357,46.566
CHIP_PU: C309.2 R300.1 SW300.3 SW300.4 U301.4 | length 51.7
  Top Layer (Sig) w0.203: SW300.4@20.389,3.324 SW300.3@24.539,3.324 24.739,3.324 25.654,4.238 25.654,9.068 v1(24.206,10.516) ; R300.1@32.868,22.911 32.787,22.911 32.659,22.782 32.659,22.702 32.467,22.51 32.035,22.51 v1(31.979,22.454) 31.039,23.393 31.039,27.838 31.813,28.612 C309.2@33.721,28.612 ; C309.2@33.731,28.673 34.117,29.059 U301.4@36.339,29.059
  Bottom Layer (Sig) w0.152: v1(24.206,10.516) 24.206,11.352 29.314,16.459 35.865,16.459 37.918,18.513 37.918,20.91 36.374,22.454 v1(31.979,22.454)
CLK_SD: D401.6 J401.5 R305.1 | length 27.9
  Top Layer (Sig) w0.203: R305.1@44.643,29.374 44.693,29.374 45.847,30.529 v1(45.847,30.531)
  L3 (Sig) w0.152: v1@45.847,30.632 45.847,29.437 42.474,26.064 42.431,26.064 41.719,25.352 41.719,23.893 40.458,22.632 40.458,20.772 40.415,20.729 40.415,20.01 41.447,18.978 45.905,18.978 v1(47.185,20.258)
  Bottom Layer (Sig) w0.203: J401.5@46.724,15.596 47.382,16.254 47.382,18.482 47.146,18.718 46.851,18.718 D401.6@46.603,18.966 46.603,19.679 v1@47.092,20.168
CMD_SD: D401.4 J401.3 R414.1 U301.47 | length 34.7
  Top Layer (Sig) w0.152: U301.47@40.764,31.084 40.798,31.05 40.798,30.525 v1(41.173,30.15)
  Top Layer (Sig) w0.203: v1(44.347,13.361) 46.353,15.368 v1@46.353,16.203
  Top Layer (Sig) w0.305: v1@46.353,16.203 v1@46.38,16.231
  L3 (Sig) w0.152: v1(41.173,30.15) 41.107,30.216 41.107,30.609 40.996,30.72 39.688,30.72 38.659,29.691 38.659,29.516 38.51,29.368 38.51,28.885 38.768,28.627 38.768,28.145 38.51,27.887 38.51,27.413 38.768,27.155 38.768,26.7 38.659,26.591 38.659,26.589 37.46,25.39 37.46,21.995 44.347,15.109 v1(44.347,13.361)
  Bottom Layer (Sig) w0.203: R414.1@42.148,18.473 42.148,18.423 42.296,18.275 42.346,18.275 43.032,17.589 43.032,17.576 43.211,17.397 43.224,17.397 44.101,16.521 44.101,15.67 44.378,15.392 J401.3@44.399,15.392 ; J401.3@44.323,14.681 44.347,14.658 v1(44.347,13.361) ; v1@46.38,16.166 D401.4@46.38,16.869
  Bottom Layer (Sig) w0.305: D401.4@46.38,16.869 46.578,17.066 D401.4@46.603,17.066
  other v1: 46.353,16.257
CS_LCD: J400.38 R413.2 U301.51 | length 20.9
  Top Layer (Sig) w0.152: U301.51@39.164,31.084 39.19,31.11 39.19,31.512 39.784,32.106 v1(39.878,32.106) ; v1(55.817,29.583) 56.198,29.202 56.198,28.951 56.32,28.829 R413.2@56.363,28.829 ; R413.2@56.372,28.727 56.448,28.651 J400.38@57.836,28.651
  Bottom Layer (Sig) w0.152: v1(39.878,32.106) 53.295,32.106 v1@55.829,29.571
D/CX_LCD: J400.36 U301.43 | length 21.2
  Top Layer (Sig) w0.152: U301.43@42.364,31.084 42.364,31.299 42.398,31.333 42.982,31.333 45.126,33.477 50.47,33.477 53.296,30.651 53.296,29.444 55.064,27.677 57.338,27.677 J400.36@57.353,27.692 ; J400.36@57.914,27.675 58.62,27.675 59.08,27.214 v1@59.08,26.657
  Top Layer (Sig) w0.254: v1@59.08,26.657 59.118,26.619 v1@59.157,26.619
  other v1: 59.08,26.543
DACL: B100.8 C107.2 R103.1 U101.6 | length 8.2
  Bottom Layer (Sig) w0.152: U101.6@18.436,31.728 18.436,31.017 C107.2@18.796,30.658 ; R103.1@18.652,29.446 18.652,30.265 18.893,30.505 C107.2@18.898,30.505 ; R103.1@18.669,29.38 18.896,29.152 24.384,29.152 B100.8@24.408,29.176
DACLB: B100.9 C101.2 R101.1 U101.2 | length 14.6
  Bottom Layer (Sig) w0.152: U101.2@17.936,34.428 17.936,35.55 18.186,35.8 R101.1@18.186,36.685 ; R101.1@18.153,36.805 19.402,36.805 21.209,34.998 21.209,29.896 21.529,29.576 B100.9@24.408,29.576
DACR: B100.3 C100.2 R100.1 U100.2 | length 7.3
  Bottom Layer (Sig) w0.152: U100.2@17.962,25.183 R100.1@17.962,26.145 ; R100.1@18.102,26.104 R100.1@18.102,26.187 ; C100.2@18.212,27.313 22.951,27.313 23.088,27.176 B100.3@24.408,27.176
DACRB: B100.2 C106.2 R102.1 U100.6 | length 13.6
  Bottom Layer (Sig) w0.152: U100.6@18.491,22.228 18.491,21.837 18.518,21.81 18.518,21.748 18.842,21.424 C106.2@18.892,21.424 18.883,21.424 18.559,21.1 R102.1@18.559,20.328 ; R102.1@18.694,20.371 20.269,20.371 21.59,21.692 21.59,26.569 21.932,26.911 22.886,26.911 22.975,26.822 24.02,26.822 24.042,26.8 24.384,26.8 B100.2@24.408,26.776
DAT0_SD: D401.3 J401.7 R415.1 U301.48 | length 27.7
  Top Layer (Sig) w0.152: v1(39.929,30.175) 40.015,30.175 40.364,30.524 U301.48@40.364,31.084
  Bottom Layer (Sig) w0.152: v1(39.929,30.175) 40.441,29.663 40.81,29.663 41.768,28.705 41.768,28.1 41.738,28.069 41.738,27.442 41.768,27.412 41.768,26.784 41.762,26.777 41.762,24.988 43.618,23.132 49.715,23.132 v1(50.546,22.301)
  Bottom Layer (Sig) w0.203: J401.7@48.749,14.971 48.976,15.198 48.976,15.702 50.286,17.012 50.286,17.266 51.491,18.471 51.574,18.471 51.714,18.611 R415.1@51.714,18.694 ; J401.7@49.003,15.675 D401.3@49.003,17.066 ; v1(50.546,22.301) 51.722,21.125 R415.1@51.722,18.669
DATA1_DAC: B100.19 U301.13 | length 22.2
  Top Layer (Sig) w0.152: v1(29.947,20.142) 32.918,20.142 35.76,22.984 35.76,25.274 35.909,25.423 36.001,25.423 36.004,25.425 36.306,25.425 U301.13@36.339,25.459
  L3 (Sig) w0.152: v1(29.337,28.677) 31.182,26.832 31.182,23.808 31.42,23.57 31.42,21.082 30.48,20.142 v1(29.947,20.142)
  Bottom Layer (Sig) w0.152: B100.19@27.408,28.776 29.143,28.776 29.243,28.677 v1@29.29,28.723
DATA2_DAC: B100.18 U301.14 | length 24.8
  Top Layer (Sig) w0.152: v1(30.861,19.228) 32.649,19.228 36.339,22.918 U301.14@36.339,25.059
  L3 (Sig) w0.152: v1(30.861,19.228) 31.628,19.995 32.483,20.849 32.483,28.3 31.054,29.728 v1(31.023,29.728)
  Bottom Layer (Sig) w0.152: B100.18@27.408,29.176 27.432,29.2 27.774,29.2 27.796,29.222 29.409,29.222 29.524,29.337 30.63,29.337 31.021,29.728 v1(31.023,29.728)
DATA_CLK_DAC: B100.20 U301.12 | length 25.1
  Top Layer (Sig) w0.152: v1(27.61,22.911) 29.566,20.955 33.02,20.955 35.43,23.365 35.43,25.411 35.844,25.825 36.306,25.825 U301.12@36.339,25.859
  L3 (Sig) w0.152: v1(27.61,22.911) 28.042,23.343 28.042,28.575 28.753,29.286 29.515,29.286 v1@30.531,28.27
  Bottom Layer (Sig) w0.152: B100.20@27.408,28.376 27.432,28.352 27.774,28.352 27.796,28.33 28.143,28.33 28.381,28.092 30.361,28.092 v1@30.488,28.219
  other v1: 30.582,28.219
DVDD: B100.15 C117.2
EN1_BQ: R209.1 U202.2 | length 3
  Top Layer (Sig) w0.152: R209.1@34.671,47.252 34.747,47.175 v1(34.747,45.448) 34.75,45.445 34.75,44.313 U202.2@34.753,44.31
EN2_BQ: R216.2 U202.3 | length 3.2
  Top Layer (Sig) w0.152: R216.2@33.655,47.277 33.667,47.277 33.858,47.086 33.858,45.474 34.253,45.079 U202.3@34.253,44.31
  other v1: 33.858,46.363
EN_DAC_LDO+: R244.1 R247.2 U206.3
EN_LDO+: R225.1 R231.2 U204.3
ENC_A_1: D400.1 ENC400.1 R400.1 R405.1 | length 11.6
  Bottom Layer (Sig) w0.203: R405.1@9.652,49.809 9.702,49.809 11.226,51.333 ENC400.1@11.278,51.333 ; ENC400.1@11.278,51.276 11.433,51.276 12.05,51.892 R400.1@12.751,51.892
  Bottom Layer (Sig) w0.305: D400.1@9.576,45.016 9.576,45.166 12.256,47.846 12.256,50.196 11.347,51.105 ENC400.1@11.328,51.105
ENC_B_1: D400.4 ENC400.3 R407.1 R408.2 | length 7.5
  Bottom Layer (Sig) w0.203: R408.2@4.572,51.841 5.122,51.292 6.16,51.292 ENC400.3@6.176,51.276 ; ENC400.3@6.176,51.232 6.22,51.232 7.651,49.801 8.569,49.801 R407.1@8.636,49.801 ; D400.4@7.62,47.588 7.62,48.717 8.438,49.535 8.438,49.652 R407.1@8.569,49.784
FB_BB_3.3: C225.1 C226.1 R236.1 R240.2 U205.9 | length 13.7
  Top Layer (Sig) w0.203: R240.2@28.211,9.032 29.229,9.032 ; C226.1@28.263,9.997 28.263,9.91 28.374,9.799 28.462,9.799 29.229,9.032 ; U205.9@29.777,11.317 29.828,11.266 29.828,10.774 30.477,10.124 v1(31.42,10.124) ; 30.505,10.135 29.403,9.032 29.229,9.032 ; C225.1@32.288,12.461 32.288,13.354 R236.1@32.474,13.541 ; R236.1@32.41,13.604 32.436,13.629 v1(32.436,14.62)
  Bottom Layer (Sig) w0.203: v1(31.42,10.124) 31.42,13.604 v1(32.436,14.62)
FB_BB_3.9: R200.1 R212.2 R213.2 U200.9 | length 10.4
  Top Layer (Sig) w0.203: R200.1@18.055,45.313 22.733,45.313 23.927,44.12 ; U200.9@23.851,43.358 23.949,43.259 23.949,42.949 24.295,42.603 R213.2@25.183,42.603 ; U200.9@23.901,43.688 23.927,43.713 23.927,44.12 ; R212.2@25.527,44.552 25.509,44.534 24.341,44.534 23.927,44.12
GND: B100.11 B100.14 B100.22 B100.30 B100.31 C102.1 C103.1 C104.1 C105.1 C108.1 C109.1 C110.1 C111.1 C112.1 C113.1 C114.1 C115.1 C116.1 C117.1 C119.1 C120.1 C121.1 C122.1 C125.1 C126.1 C127.1 C128.1 C129.1 C130.1 C131.1 C132.2 C133.1 C134.1 C135.1 C136.1 C137.2 C139.1 C200.1 C202.1 C203.1 C204.1 C206.1 C208.1 C209.1 C210.1 C211.1 C213.1 C214.1 C215.1 C216.1 C217.1 C218.1 C219.1 C220.1 C221.1 C222.1 C223.2 C224.1 C227.1 C228.1 C229.1 C230.1 C231.1 C232.1 C233.2 C300.1 C301.1 C302.1 C303.1 C304.1 C305.1 C306.1 C307.1 C308.2 C309.1 C310.2 C311.1 C312.1 C400.1 C401.1 C402.1 C403.1 C404.1 C405.1 C407.1 C408.1 C409.1 C412.1 C413.1 CR300.2 CR300.4 D100.1 D201.C D202.3 D203.3 D400.2 D401.2 ENC400.2 J100.1 J100.SH1 J100.SH2 J100.SH3 J200.2 J200.4 J200.5 J201.A1 J201.A12 J201.B1 J201.B12 J201.S1 J201.S2 J201.S3 J201.S4 J400.11 J400.12 J400.13 J400.14 J400.15 J400.16 J400.17 J400.18 J400.19 J400.20 J400.21 J400.22 J400.23 J400.24 J400.25 J400.26 J400.27 J400.28 J400.29 J400.30 J400.31 J400.32 J400.43 J400.48 J400.49 J400.50 J401.6 J401.G1 J401.G2 J401.G3 J401.G4 pad.@58,5 Q400.2 R106.1 R107.1 R111.1 R112.1 R113.1 R126.1 R129.1 R130.1 R133.1 R205.1 R207.1 R212.1 R215.1 R216.1 R217.1 R218.1 R221.1 R224.1 R226.1 R228.1 R229.1 R230.1 R231.1 R232.1 R233.1 R234.1 R235.1 R239.1 R240.1 R245.1 R246.1 R247.1 R248.1 R308.1 R401.1 R402.1 R403.1 R404.1 R406.1 R412.1 R413.1 R422.1 R424.1 R425.1 SW300.1 SW300.2 SW301.3 SW301.4 U100.3 U100.5 U101.3 U101.5 U103.3 U200.2 U200.5 U201.2 U202.4 U202.15 U202.16 U202.25 U203.9 U203.13 U204.8 U204.11 U205.2 U205.5 U206.8 U206.11 U300.4 U300.9 U301.57 U400.12 U400.17 Y100.2 Y101.2 | length 65.1
  Top Layer (Sig) w0.254: U203.9@8.197,24.95 8.197,25.748 U203.13@8.204,25.756 ; SW300.2@20.389,1.174 SW300.1@24.539,1.174 ; SW301.3@20.419,4.754 SW301.4@24.569,4.754 ; U202.25@33.753,41.195 U202.25@33.757,41.199 ; U202.4@33.753,44.31 33.753,43.565 U202.25@33.757,43.561 ; U202.25@34.239,41.173 U202.25@34.253,41.16 ; C306.1@42.113,33.655 C306.1@42.123,33.645 ; R413.1@55.372,28.727 R413.1@55.372,28.777
  Bottom Layer (Sig) w0.152: v1@5.842,22.606 v1@5.96,22.606 ; v1@7.858,26.821 v1(7.858,26.85) ; v1@7.858,26.94 v1@7.903,26.895 ; C125.1@8.592,28.106 C125.1@8.592,28.194 ; 9.625,27.327 9.625,27.34
  Bottom Layer (Sig) w0.203: C127.1@10.49,35.707 C127.1@10.521,35.738 ; U101.3@18.436,34.428 18.46,34.452 18.46,34.793 19.307,35.64 19.316,35.64 19.46,35.785 v1(19.541,35.785) 20.071,35.255 20.071,34.902 20.182,34.791 C110.1@20.269,34.791 ; U101.5@18.96,31.75 U101.5@18.96,31.777 ; R107.1@21.946,18.313 R107.1@21.964,18.295 ; v1(21.957,17.6) v1@21.964,17.606 ; v1(22.123,22.352) Y101.2@22.885,22.352 ; C139.1@22.352,32.189 22.352,32.205 22.651,32.504 23.325,32.504 23.444,32.385 C116.1@23.444,31.185 ; v1(22.377,23.647) 22.377,24.435 C115.1@22.428,24.486 ; C105.1@23.354,18.655 C105.1@23.393,18.694 ; 23.47,31.801 23.499,31.801 23.72,31.58 C119.1@24.384,31.58 ; v1@23.495,24.613 23.498,24.616 23.498,25.302 C114.1@23.52,25.324 ; 25.108,30.077 B100.11@25.108,30.676 ; B100.14@26.308,30.676 26.31,30.675 26.31,30.028 B100.31@26.34,29.997 ; B100.31@26.594,27.584 26.594,27.576 B100.22@27.408,27.576 ; Y100.2@26.707,22.059 Y100.2@26.721,22.073 ; C122.1@26.892,31.58 26.892,31.646 C122.1@27.003,31.757 ; C122.1@27.024,31.778 27.003,31.778 C122.1@27.003,31.757 ; C117.1@27.62,32.16 27.731,32.049 C117.1@27.788,32.049 27.7,32.049 27.589,31.938 27.589,31.876 27.47,31.757 C122.1@27.003,31.757 ; C112.1@27.991,25.477 28.078,25.477 28.189,25.588 28.189,25.675 28.346,25.832 28.829,25.832 ; v1@28.293,32.839 v1@28.321,32.868 ; C103.1@30.836,22.86 C103.1@30.848,22.847 ; v1@30.848,22.212 v1(30.861,22.2) ; C113.1@30.963,24.816 C113.1@31.011,24.864
  Bottom Layer (Sig) w0.254: v1(5.389,23.53) 5.432,23.487 6.714,23.487 C129.1@6.807,23.393 ; v1(5.444,30.91) 5.491,30.863 7.617,30.863 7.747,30.733 C132.2@7.747,30.658 ; v1@5.461,31.547 5.385,31.547 5.385,32.233 ; C131.1@5.883,33.985 5.883,33.105 5.385,32.607 5.385,32.233 ; v1@5.992,22.666 5.9,22.666 v1(5.853,22.619) 7.607,22.619 7.701,22.525 7.744,22.525 7.874,22.395 C128.1@7.874,22.352 ; v1@6.02,25.883 6.036,25.883 6.148,25.995 6.853,25.995 7.076,26.218 C136.1@7.076,26.518 ; R126.1@6.29,32.613 6.29,32.563 6.167,32.44 6.117,32.44 5.909,32.233 5.385,32.233 ; C136.1@7.087,26.619 C136.1@7.303,26.835 ; v1@7.843,26.835 v1(7.858,26.85) ; v1(7.849,25.984) 8.395,25.437 8.834,25.437 8.957,25.314 R133.1@8.957,25.264 ; v1@7.858,26.94 7.858,27.372 C125.1@8.592,28.106 ; 8.255,27.711 8.443,27.523 9.442,27.523 9.625,27.34 ; R133.1@9.017,25.07 9.051,25.07 9.454,24.667 U103.3@9.454,21.275 ; 9.625,27.327 9.809,27.144 C137.2@10.25,27.144 ; C127.1@10.521,35.738 v1@11.608,35.738 ; C134.1@10.8,22.377 10.812,22.365 11.4,22.365 v1(11.413,22.377) ; C135.1@11.924,23.419 12.151,23.193 12.151,22.663 12.421,22.393 v1(12.421,22.327) ; v1(12.852,21.717) 12.852,21.784 12.99,21.921 12.99,22.972 13.122,23.104 13.422,23.104 C130.1@13.513,23.195 ; C126.1@14.464,30.708 15.367,30.708 v1@15.367,30.683 ; v1(15.326,32.831) 16.129,32.831 C111.1@16.129,32.817 ; C109.1@16.104,21.757 16.104,21.285 16.369,21.02 v1(16.417,21.02) ; U100.3@18.462,25.183 18.464,25.185 18.464,25.586 18.657,25.779 18.657,26.15 19.126,26.619 20.676,26.619 ; U100.5@18.962,22.483 20.273,22.483 21.006,23.216 v1@21.057,23.216 ; C108.1@20.295,25.883 20.382,25.883 20.701,26.202 20.701,26.619 ; v1@21.964,17.606 R107.1@21.964,18.295 ; v1(23.354,17.93) C105.1@23.354,18.655 ; v1(23.546,16.967) 23.593,17.014 23.694,17.014 24.192,17.513 24.28,17.513 24.365,17.599 C104.1@24.365,17.686 ; v1(26.707,21.41) Y100.2@26.707,22.059 ; v1(28.727,19.406) R106.1@28.727,20.255 ; C102.1@29.661,21.846 C102.1@29.743,21.928 ; v1@30.848,22.212 C103.1@30.848,22.847 ; C113.1@31.011,24.864 v1(31.686,24.864) ; R112.1@31.323,32.195 31.446,32.072 R112.1@31.496,32.072